# Altium PCB MICROCONTROLLER_01.PcbDoc
Units mm, origin at the board's own origin, x right, y up, seen from the top; angles counter-clockwise.
Board outline 88.9 x 65.02 mm, 2 copper layers (Top Layer, Bottom Layer); 33 components, 31 nets, 140 pads, 0 vias.
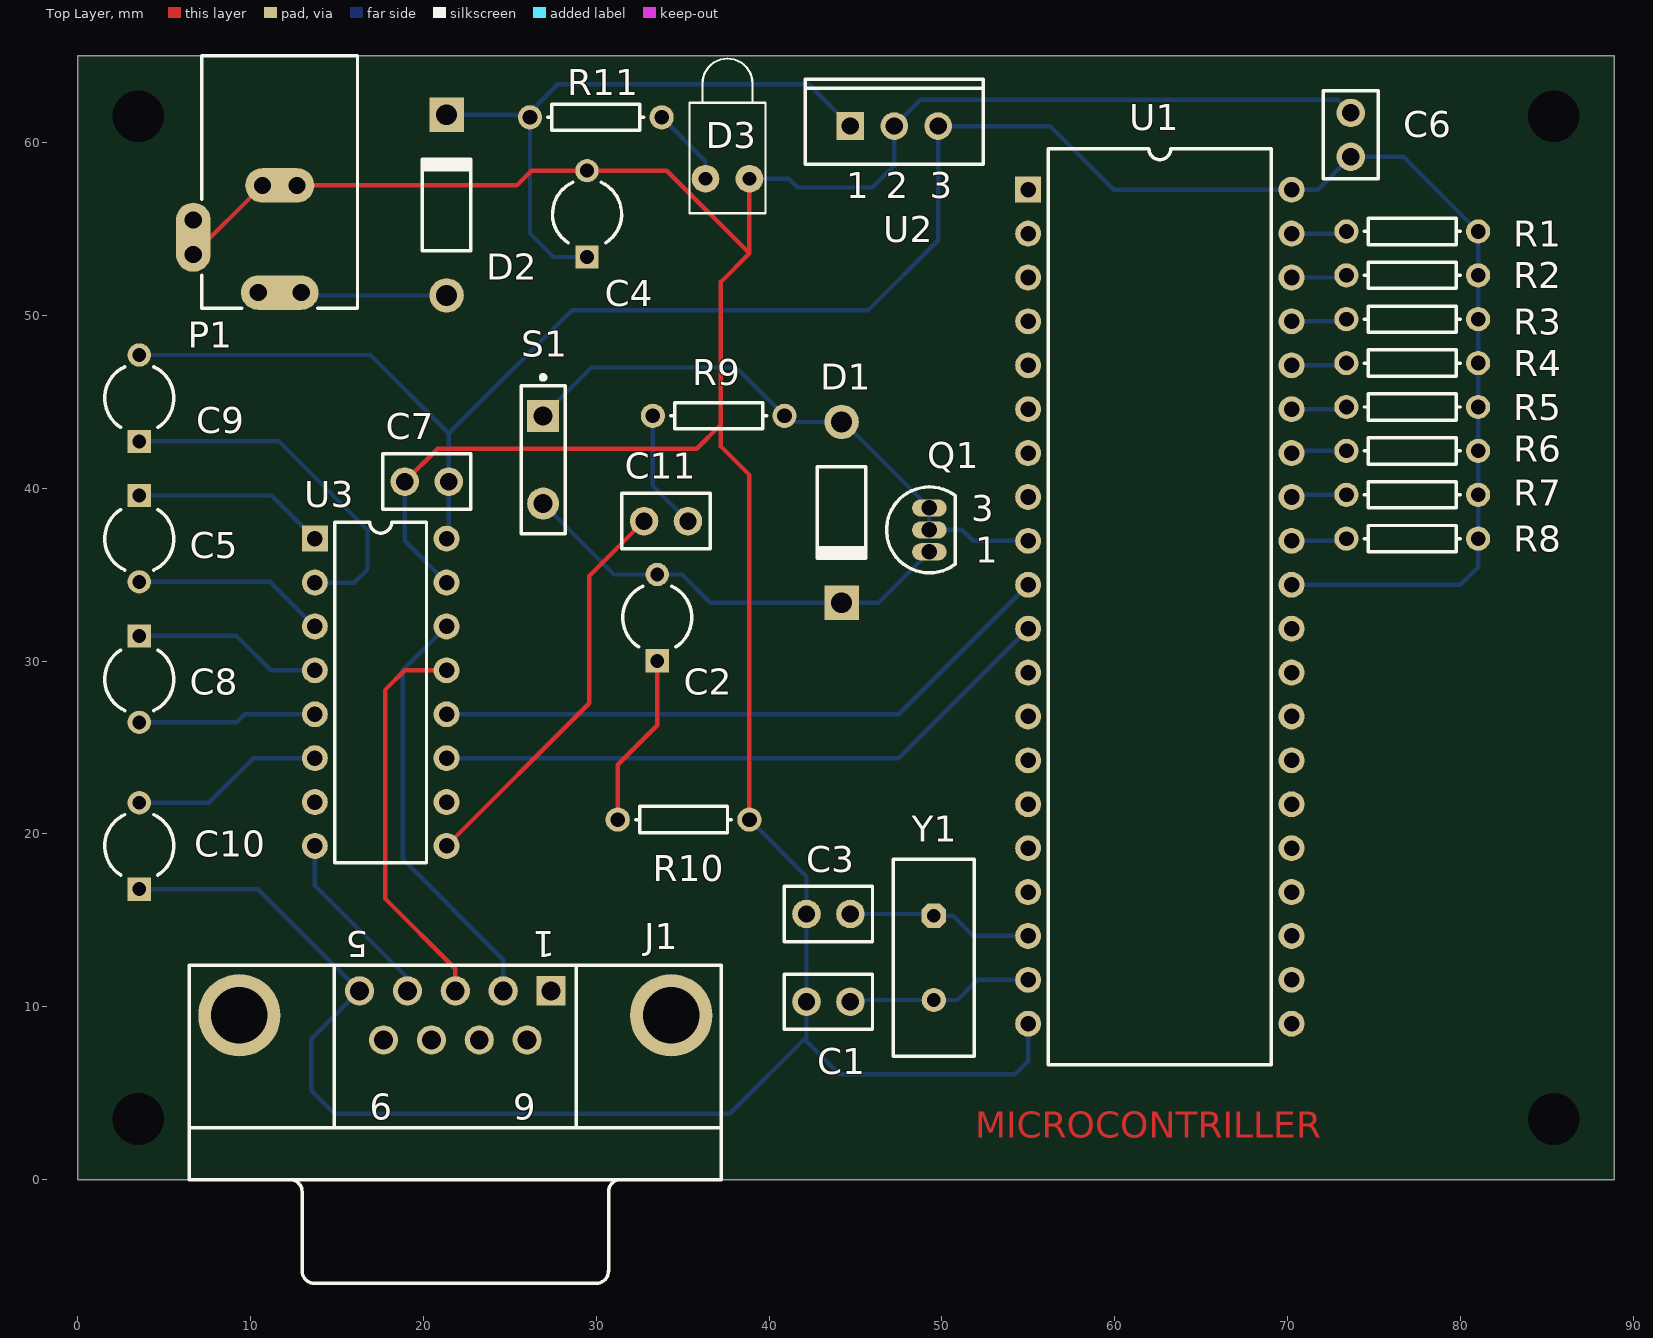
[diagram p0: Top Layer view]
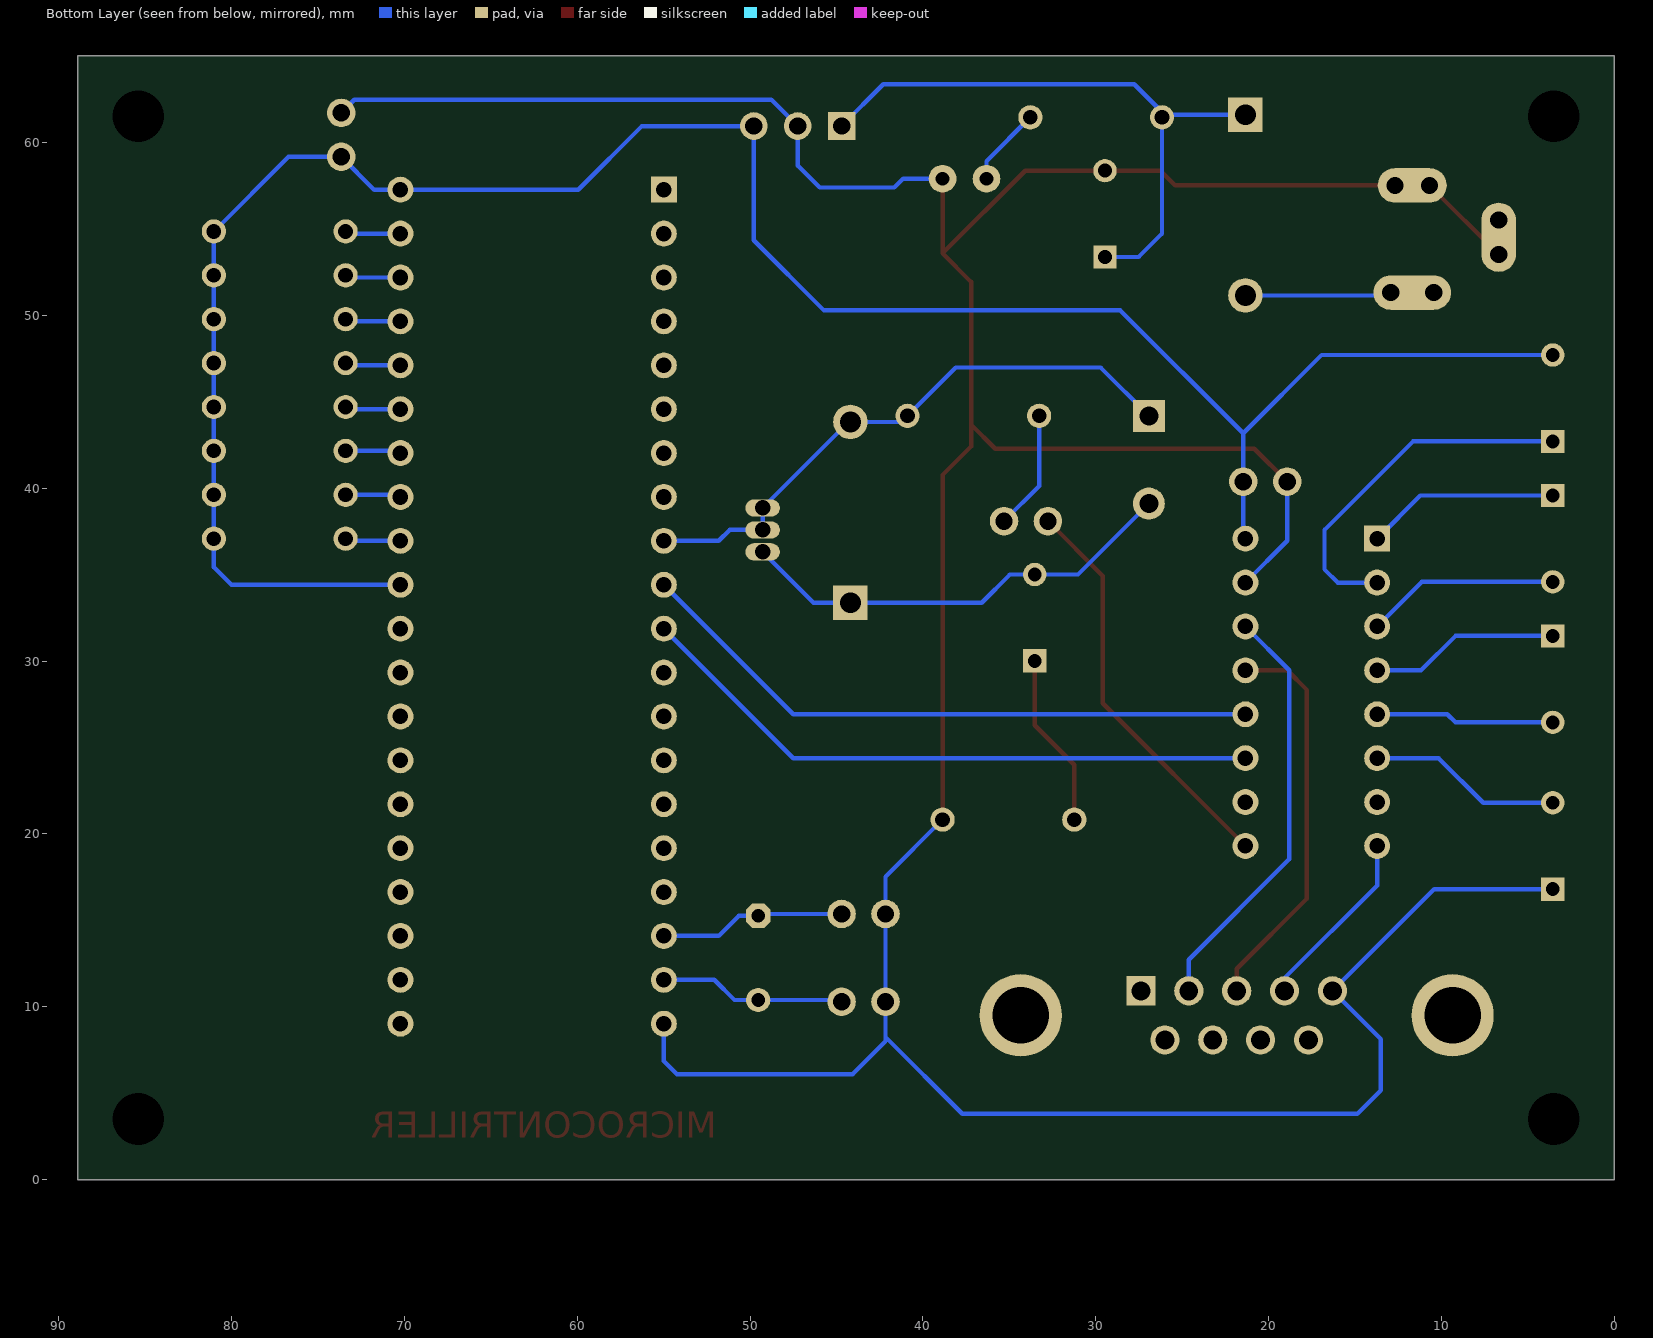
[diagram p1: Bottom Layer view, seen from below]

## Layer stack, top to bottom
Top Layer: signal copper 0.0356
Dielectric: dielectric 0.32, FR-4, Dk 4.8
Bottom Layer: signal copper 0.0356

## Board outline
0,0 0,65.024 88.9,65.024 88.9,0

## Design rules (kind name [scope] priority, off if disabled: settings)
Clearance [All] p1: gap=0.254
PolygonConnect [All] p1: connectstyle=Relief reliefconductorwidth=0.254 reliefentries=4 polygonreliefangle="90 Angle"
RoutingVias [All] p1: holewidth=0.711 width=1.27 viastyle="Through Hole" minholewidth=0.711 minwidth=1.27 maxholewidth=0.711 maxwidth=1.27
SilkscreenOverComponentPads [All] p1: minsilkscreentomaskgap=0.254
SolderMaskExpansion [All] p1: expansion=0.102
Width [All] p1: maxlimit=0.254 minlimit=0.254 preferedwidth=0.254
27 further rules are at their usual default settings.

## Components (designator, comment, footprint, x,y, rotation, side; value= is the part's Value field where it differs from the comment)
C1 "Cap" CAPR2.54-5.1x3.2 43.434,10.287 r180 top
C2 "Cap2" CAPR5-4X5 33.528,32.512 r90 top
C3 "Cap" CAPR2.54-5.1x3.2 43.434,15.367 r180 top
C4 "Cap2" CAPR5-4X5 29.464,55.88 r90 top
C5 "Cap2" CAPR5-4X5 3.556,37.084 r270 top
C6 "Cap" CAPR2.54-5.1x3.2 73.66,60.452 r270 top
C7 "Cap" CAPR2.54-5.1x3.2 20.193,40.386 r180 top
C8 "Cap2" CAPR5-4X5 3.556,28.956 r270 top
C9 "Cap2" CAPR5-4X5 3.556,45.212 r90 top
C10 "Cap2" CAPR5-4X5 3.556,19.304 r90 top
C11 "Cap" CAPR2.54-5.1x3.2 34.036,38.1 r0 top
D1 "Diode 1N4007" DIO10.46-5.3x2.8 44.196,38.608 r270 top
D2 "Diode 1N4007" DIO10.46-5.3x2.8 21.336,56.388 r90 top
D3 "LED1" LED-1 37.592,57.912 r90 top
J1 "D Connector 9" DSUB1.385-2H9 21.844,0 r180 top
P1 "PWR2.5" KLD-0202 11.684,65.024 r270 top
Q1 "2N3906" BCY-W3/E4 49.276,37.592 r0 top
R1 "Res1" AXIAL-0.3 77.216,54.864 r0 top
R2 "Res1" AXIAL-0.3 77.216,52.324 r0 top
R3 "Res1" AXIAL-0.3 77.216,49.784 r0 top
R4 "Res1" AXIAL-0.3 77.216,47.244 r0 top
R5 "Res1" AXIAL-0.3 77.216,44.704 r0 top
R6 "Res1" AXIAL-0.3 77.216,42.164 r0 top
R7 "Res1" AXIAL-0.3 77.216,39.624 r0 top
R8 "Res1" AXIAL-0.3 77.216,37.084 r0 top
R9 "Res1" AXIAL-0.3 37.084,44.196 r0 top
R10 "Res1" AXIAL-0.3 35.052,20.828 r180 top
R11 "Res1" AXIAL-0.3 29.972,61.468 r180 top
S1 "RESET" SPST-2 26.924,41.656 r270 top
U1 "P89C51RC2HBP" SOT129-1 62.611,33.147 r270 top
U2 "MC7805ACT" 221A-04 47.244,60.96 r0 top
U3 "MAX232N" N016 17.526,28.194 r270 top
Y1 "22.1184MHZ" HC-49U 49.53,12.827 r270 top

## Footprints (in the part's own frame and the unit in brackets; to place one, negate y for a bottom-side part, rotate by r counter-clockwise, add the part's x,y. Pads: shape width x height; smd on the part's side, far side on the other; paste and mask are expansions set on the pad)
221A-04 [mm] "TO, Thru-Hole, Vertical, Heatsink Mounted; 3 In-Line Leads; Pitch 2.54 mm"
  rect 1.6x1.6 hole 1: 1(-2.54,0)
  round 1.6 hole 1: 2(0,0) 3(2.54,0)
  silkscreen extent -5.15,-2.2 5.15,2.7
AXIAL-0.3 [mm] "Axial Device, Thru-Hole; 2 Leads; 0.3 in Pin Spacing"
  round 1.4 hole 0.85: 1(-3.81,0) 2(3.81,0)
  silkscreen extent -2.77,-0.76 2.77,0.76
BCY-W3/E4 [mm] "TO, Flat Index; 3 In-Line, Axial Leads; Body Dia. 4.5mm; Leads 0.51 x 0.48 mm (max)"
  oval 2x1 hole 0.9: 1(0,-1.27) 2(0,0) 3(0,1.27)
  silkscreen extent -2.48,-2.48 1.5,2.48
CAPR2.54-5.1x3.2 [mm] "Capacitor, Ceramic, Thru-Hole, Dipped Radial; Body 5.1 x 3.2 mm (WxT) Pin Spacing 2.54 mm (typ)"
  round 1.65 hole 1: 1(-1.27,0) 2(1.27,0)
  silkscreen extent -2.55,-1.6 2.55,1.6
CAPR5-4X5 [mm] "Capacitor; 2 Leads"
  rect 1.35x1.35 hole 0.8: 1(-2.5,0)
  round 1.35 hole 0.8: 2(2.5,0)
  silkscreen extent -1.69,-2 1.82,2
DIO10.46-5.3x2.8 [mm] "Diode, Axial; Body 5.2 x 2.7 mm (LxDia. max), Lead Dia. 0.86 mm (max)"
  round 2 hole 1.2: 1(-5.23,0)
  rect 2x2 hole 1.2: 2(5.23,0)
  silkscreen extent -2.65,-1.4 2.74,1.4
DSUB1.385-2H9 [mm] "Connector; D Subminiature; 9 Position; Right Angle; Pitch 1.385 mm"
  rect 1.69x1.69 hole 1.09: 1(-5.54,-10.92)
  round 1.69 hole 1.09: 2(-2.77,-10.92) 3(0,-10.92) 4(2.77,-10.92) 5(5.54,-10.92) 6(-4.155,-8.08) 7(-1.385,-8.08) 8(1.385,-8.08) 9(4.155,-8.08)
  round 4.76 hole 3.26: 10(-12.495,-9.5) 11(12.495,-9.5)
  silkscreen extent -15.4,-12.4 15.4,6
HC-49U [mm] "Quartz Crystal, Thru-Hole; 2 Leads; Body 11.35 x 4.65 x 13.46 mm (LxWxH max)"
  oct 1.4x1.4 hole 0.8: 1(-2.44,0)
  round 1.4 hole 0.8: 2(2.44,0)
  silkscreen extent -5.7,-2.35 5.7,2.35
KLD-0202 [mm] "DC Power Jack, 2.5mm, KLD Series, PCB Mount"
  oval 2x4.5 all layers, no hole: 1(13.7,0)
  round 1.5 hole 1: 1A(13.7,-1.25) 1B(13.7,1.25) 2A(7.5,-1) 2B(7.5,1) 3A(9.5,-5) 3B(11.5,-5)
  oval 2x4 all layers, no hole: 2(7.5,0)
  oval 4x2 all layers, no hole: 3(10.5,-5)
  silkscreen extent 0,-4.5 14.6,4.5
LED-1 [mm] "Typical RED GaAs LED; 2 Leads"
  round 1.6 hole 0.8: 1(0,1.27) 2(0,-1.27)
  silkscreen extent -2,-2.2 6.95,2.2
N016 [mm] "DIP; 16 Leads; Row Spacing 7.62 mm; Pitch 2.54 mm"
  rect 1.5x1.5 hole 0.9: 1(-8.89,-3.81)
  round 1.5 hole 0.9: 2(-6.35,-3.81) 3(-3.81,-3.81) 4(-1.27,-3.81) 5(1.27,-3.81) 6(3.81,-3.81) 7(6.35,-3.81) 8(8.89,-3.81) 9(8.89,3.81) 10(6.35,3.81) 11(3.81,3.81) 12(1.27,3.81) 13(-1.27,3.81) 14(-3.81,3.81) 15(-6.35,3.81) 16(-8.89,3.81)
  silkscreen extent -9.85,-2.65 9.85,2.65
SOT129-1 [mm] "DIP, Plastic; 40 Leads; Row Spacing 15.24 mm; Pitch 2.54 mm"
  rect 1.5x1.5 hole 0.9: 1(-24.13,-7.62)
  round 1.5 hole 0.9: 2(-21.59,-7.62) 3(-19.05,-7.62) 4(-16.51,-7.62) 5(-13.97,-7.62) 6(-11.43,-7.62) 7(-8.89,-7.62) 8(-6.35,-7.62) 9(-3.81,-7.62) 10(-1.27,-7.62) 11(1.27,-7.62) 12(3.81,-7.62) 13(6.35,-7.62) 14(8.89,-7.62) 15(11.43,-7.62) 16(13.97,-7.62) 17(16.51,-7.62) 18(19.05,-7.62) 19(21.59,-7.62) 20(24.13,-7.62) 21(24.13,7.62) 22(21.59,7.62) 23(19.05,7.62) 24(16.51,7.62) 25(13.97,7.62) 26(11.43,7.62) 27(8.89,7.62) 28(6.35,7.62) 29(3.81,7.62) 30(1.27,7.62) 31(-1.27,7.62) 32(-3.81,7.62) 33(-6.35,7.62) 34(-8.89,7.62) 35(-11.43,7.62) 36(-13.97,7.62) 37(-16.51,7.62) 38(-19.05,7.62) 39(-21.59,7.62) 40(-24.13,7.62)
  silkscreen extent -26.5,-6.45 26.5,6.45
SPST-2 [mm] "Circuit Breaker; 2 Leads"
  rect 1.85x1.85 hole 1.1: 1(-2.54,0)
  round 1.85 hole 1.1: 2(2.54,0)
  silkscreen extent -4.89,-1.27 4.28,1.27

## Part data
C1 C2 C3 C4 C5 C6 C7 C8 C9 C10 C11: "Capacitor"
D1 D2: "1 Amp General Purpose Rectifier"
D3: "Typical RED GaAs LED"
J1: "Receptacle Assembly, 9 Position, Right Angle"
P1: "Low Voltage Power Supply Connector"
Q1: "PNP General Purpose Amplifier"
R1 R2 R3 R4 R5 R6 R7 R8 R9 R10 R11: "Resistor"
S1: library part SW-SPST, "Single-Pole, Single-Throw Switch"
U1: "80C51 8-Bit Flash Microcontroller Family, 32 kB ISP/IAP Flash with 512 B RAM."
U2: "3-Terminal Positive Fixed Voltage Regulator"
U3: "Dual EIA-232 Driver/Receiver"
Y1: library part ECS-18-13-1, "Crystal Oscillator"

## Free pads (board coordinates)
  round 1.524 hole 3: 0(3.5,3.5) 0(3.5,61.524) 0(85.4,3.5) 0(85.4,61.524)

## Nets (pads, with @x,y where several pads share a name; then routed paths per layer and width w, separated by ;. In a path a pad name is that pad's centre, name@x,y a point inside that pad or via, vN(x,y) a via of type N, cw(c..) or ccw(c..) an arc to the next point about the centre after c; other vN are vias at no path point)
+5V: C6.2 C7.1 C9.2 R1.2 R2.2 R3.2 R4.2 R5.2 R6.2 R7.2 R8.2 U1.31 U1.40 U2.3 U3.16 | length 131.5
  Bottom Layer w0.254: C9.2 16.931,47.712 21.463,43.18 ; U3.16 21.463,37.211 C7.1 21.463,43.18 ; U1.31 80.01,34.417 81.026,35.433 R8.2 R7.2 R6.2 R5.2 R4.2 R3.2 R2.2 R1.2 76.708,59.182 C6.2 71.755,57.277 U1.40 59.944,57.277 56.261,60.96 U2.3 49.784,54.356 45.72,50.292 28.575,50.292 21.463,43.18
CH: C11.1 U3.9 | length 23.5
  Top Layer w0.254: U3.9 29.591,27.559 29.591,34.925 C11.1
D2: J1.2 U3.14 | length 24.5
  Bottom Layer w0.254: U3.14 18.796,29.464 18.796,18.542 24.614,12.724 J1.2
D3: J1.3 U3.13 | length 23.1
  Top Layer w0.254: U3.13 18.923,29.464 17.78,28.321 17.78,16.256 21.844,12.192 J1.3
D4: J1.4 U3.8 | length 10.6
  Bottom Layer w0.254: U3.8 13.716,17.018 19.074,11.66 J1.4
GND: C1.2 C3.2 C4.2 C6.1 C7.2 C10.1 D3.2 J1.5 P1.2 P1.2A P1.2B P1.3 P1.3A P1.3B R10.1 U1.20 U2.2 U3.15 | length 225.5
  Top Layer w0.254: P1.3A P1.3 P1.3B P1.2A P1.2 P1.2B 25.393,57.524 26.249,58.38 C4.2 34.076,58.38 38.862,53.594 ; C7.2 20.828,42.291 35.814,42.291 37.211,43.688 ; R10.1 38.862,40.767 37.211,42.418 37.211,43.688 ; D3.2 38.862,53.594 ; 37.211,43.688 37.211,51.943 38.862,53.594
  Bottom Layer w0.254: C10.1 10.42,16.804 J1.5 13.512,8.128 13.512,5.157 14.859,3.81 37.719,3.81 42.164,8.255 ; C7.2 18.923,36.957 U3.15 ; R10.1 42.164,17.526 C3.2 C1.2 42.164,8.255 ; D3.2@38.862,58.42 39.37,57.912 41.148,57.912 41.656,57.404 45.974,57.404 47.244,58.674 U2.2 48.768,62.484 72.898,62.484 C6.1 ; U1.20 54.991,6.858 54.229,6.096 44.069,6.096 42.164,8.001 42.164,8.255
NetC1_1: C1.1 U1.19 Y1.2 | length 10.8
  Bottom Layer w0.254: C1.1 44.804,10.387 Y1.2 50.9,10.387 52.07,11.557 U1.19
NetC2_1: C2.1 R10.2 | length 10.1
  Top Layer w0.254: R10.2 31.242,24.003 33.528,26.289 C2.1
NetC2_2: C2.2 D1.2 Q1.1 S1.2 | length 25.9
  Bottom Layer w0.254: S1.2 31.028,35.012 C2.2 34.965,35.012 36.599,33.378 D1.2 46.332,33.378 Q1.1
NetC3_1: C3.1 U1.18 Y1.1 | length 10.8
  Bottom Layer w0.254: C3.1 49.43,15.367 Y1.1 50.646,15.267 51.816,14.097 U1.18
NetC4_1: C4.1 D2.2 R11.2 U2.1 | length 35.7
  Bottom Layer w0.254: D2.2 26.012,61.618 27.767,63.373 42.291,63.373 U2.1 ; R11.2 26.162,54.737 27.519,53.38 C4.1
NetC5_1: C5.1 U3.1 | length 11.2
  Bottom Layer w0.254: C5.1 11.216,39.584 U3.1
NetC5_2: C5.2 U3.3 | length 11.2
  Bottom Layer w0.254: C5.2 11.136,34.584 U3.3
NetC8_1: C8.1 U3.4 | length 11
  Bottom Layer w0.254: C8.1 9.184,31.456 11.176,29.464 U3.4
NetC8_2: C8.2 U3.5 | length 10.4
  Bottom Layer w0.254: C8.2 9.184,26.456 9.652,26.924 U3.5
NetC9_1: C9.1 U3.2 | length 21
  Bottom Layer w0.254: C9.1 11.644,42.712 16.764,37.592 16.764,35.306 16.002,34.544 U3.2
NetC10_2: C10.2 U3.6 | length 11.2
  Bottom Layer w0.254: C10.2 7.58,21.804 10.16,24.384 U3.6
NetC11_2: C11.2 R9.1 | length 6.9
  Bottom Layer w0.254: R9.1 33.274,40.132 C11.2
NetD1_1: D1.1 Q1.2 Q1.3 R9.2 S1.1 U1.9 | length 34.1
  Bottom Layer w0.254: S1.1 29.718,46.99 38.1,46.99 R9.2 41.252,43.838 D1.1 44.3,43.838 Q1.3 Q1.2 51.181,37.592 51.816,36.957 U1.9
NetD2_1: D2.1 P1.1 P1.1A P1.1B | length 11
  Bottom Layer w0.254: P1.1A P1.1 P1.1B 13.1,51.158 D2.1
NetD3_1: D3.1 R11.1 | length 4.6
  Bottom Layer w0.254: R11.1 36.322,58.928 D3.1
NetR1_1: R1.1 U1.39 | length 3.2
  Bottom Layer w0.254: U1.39 73.279,54.737 R1.1
NetR2_1: R2.1 U1.38 | length 3.9
  Bottom Layer w0.254: U1.38@70.866,52.197 U1.38 73.279,52.197 R2.1
NetR3_1: R3.1 U1.37 | length 3.2
  Bottom Layer w0.254: U1.37 73.279,49.657 R3.1
NetR4_1: R4.1 U1.36 | length 3.2
  Bottom Layer w0.254: U1.36 73.279,47.117 R4.1
NetR5_1: R5.1 U1.35 | length 3.2
  Bottom Layer w0.254: U1.35 73.279,44.577 R5.1
NetR6_1: R6.1 U1.34 | length 3.2
  Bottom Layer w0.254: U1.34 70.358,42.164 R6.1
NetR7_1: R7.1 U1.33 | length 3.2
  Bottom Layer w0.254: U1.33 70.358,39.624 R7.1
NetR8_1: R8.1 U1.32 | length 3.5
  Bottom Layer w0.254: U1.32@70.231,36.703 U1.32 73.279,36.957 R8.1
RXD: U1.10 U3.12 | length 36.8
  Bottom Layer w0.254: U3.12 47.498,26.924 U1.10
TXD: U1.11 U3.11 | length 36.8
  Bottom Layer w0.254: U3.11 47.498,24.384 U1.11
pads on no net: J1.1 J1.6 J1.7 J1.8 J1.9 J1.10 J1.11 U1.1 U1.2 U1.3 U1.4 U1.5 U1.6 U1.7 U1.8 U1.12 U1.13 U1.14 U1.15 U1.16 U1.17 U1.21 U1.22 U1.23 U1.24 U1.25 U1.26 U1.27 U1.28 U1.29 U1.30 U3.7 U3.10

## Other copper
Top Layer:
  text "MICROCONTRILLER" at 51.943,2.413 h1.52

## Silkscreen, mask and mechanical layers (free items; w line width, h text height)
Mechanical 1:
  the board outline again, w0.254

## Text inside footprints (layer, text, board x,y; h text height)
J1: Top Overlay "6" at 26.499,4.975 h1.5 r180; Top Overlay "9" at 18.189,4.975 h1.5 r180; Top Overlay "5" at 16.804,14.375 h1.5 r180; Top Overlay "1" at 27.634,14.375 h1.5 r180
P1: Mechanical 1 "Alert PCB fab to slot details" at 17.75,64.738 h0.3 r270; Mechanical 1 "Assign keep-out area to slot" at 18.25,64.738 h0.3 r270; Mechanical 1 "Mech 1 - Slot cut-out" at 17.25,64.738 h0.3 r270; Mechanical 1 "Mech 2 - Clearance, move to internal plane if present" at 16.75,64.738 h0.3 r270
Q1: Top Overlay "3" at 51.706,38.102 h1.5; Top Overlay "1" at 51.936,35.692 h1.5
U2: Top Overlay "1" at 44.454,56.785 h1.5; Top Overlay "2" at 46.744,56.785 h1.5; Top Overlay "3" at 49.284,56.785 h1.5